# Altium PCB RasPi_Hat_Temp.PcbDoc
Units mil, origin at the board's own origin, x right, y up, seen from the top; angles counter-clockwise.
Board outline 2210 x 2560 mil, 4 copper layers (Top Layer, Internal Plane 1, Internal Plane 2, Bottom Layer), stack 25.634 mil thick; 2 components, 31 nets, 86 pads, 0 vias.
Unrouted connection lines stored in the file: 2.
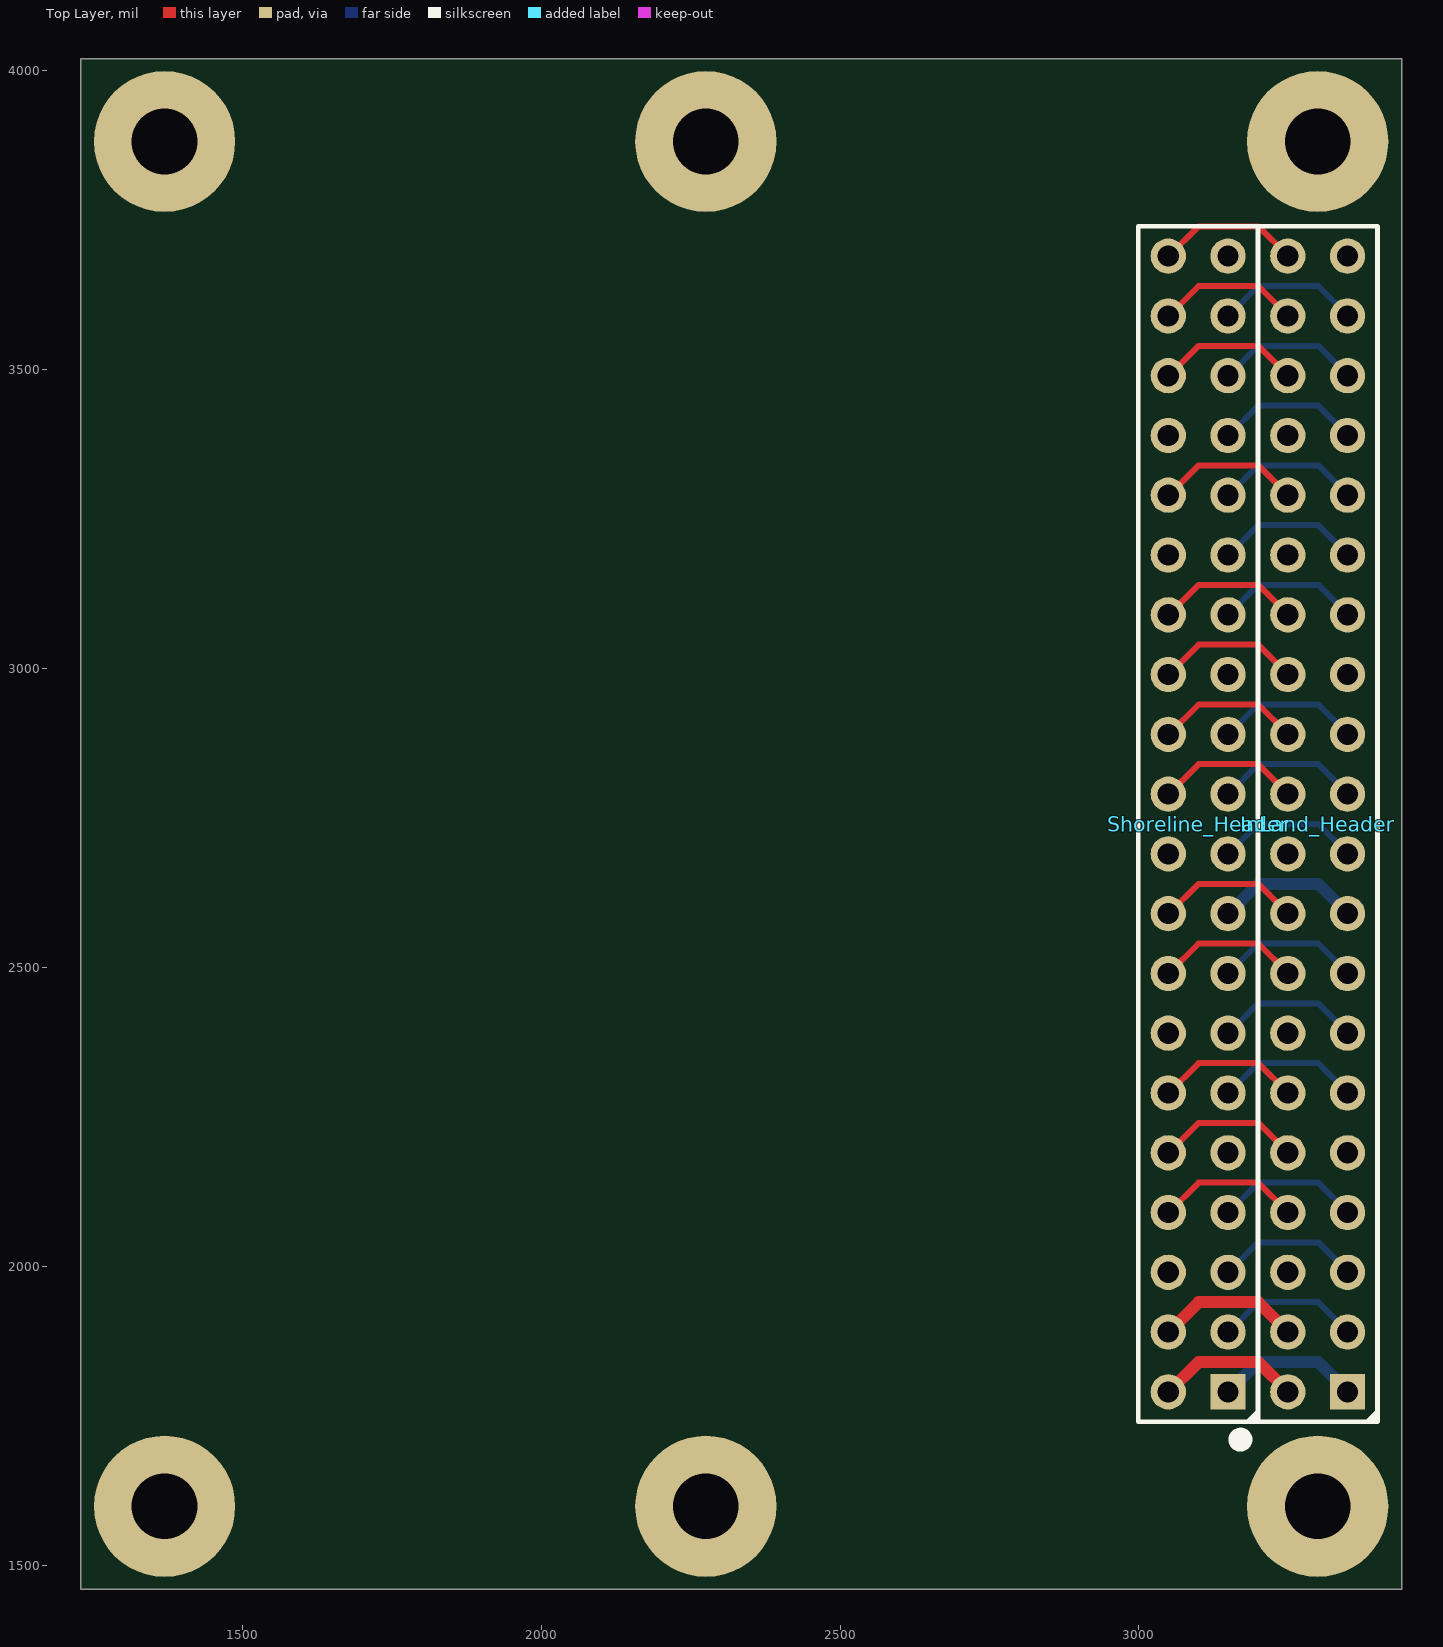
[diagram p0: Top Layer view]
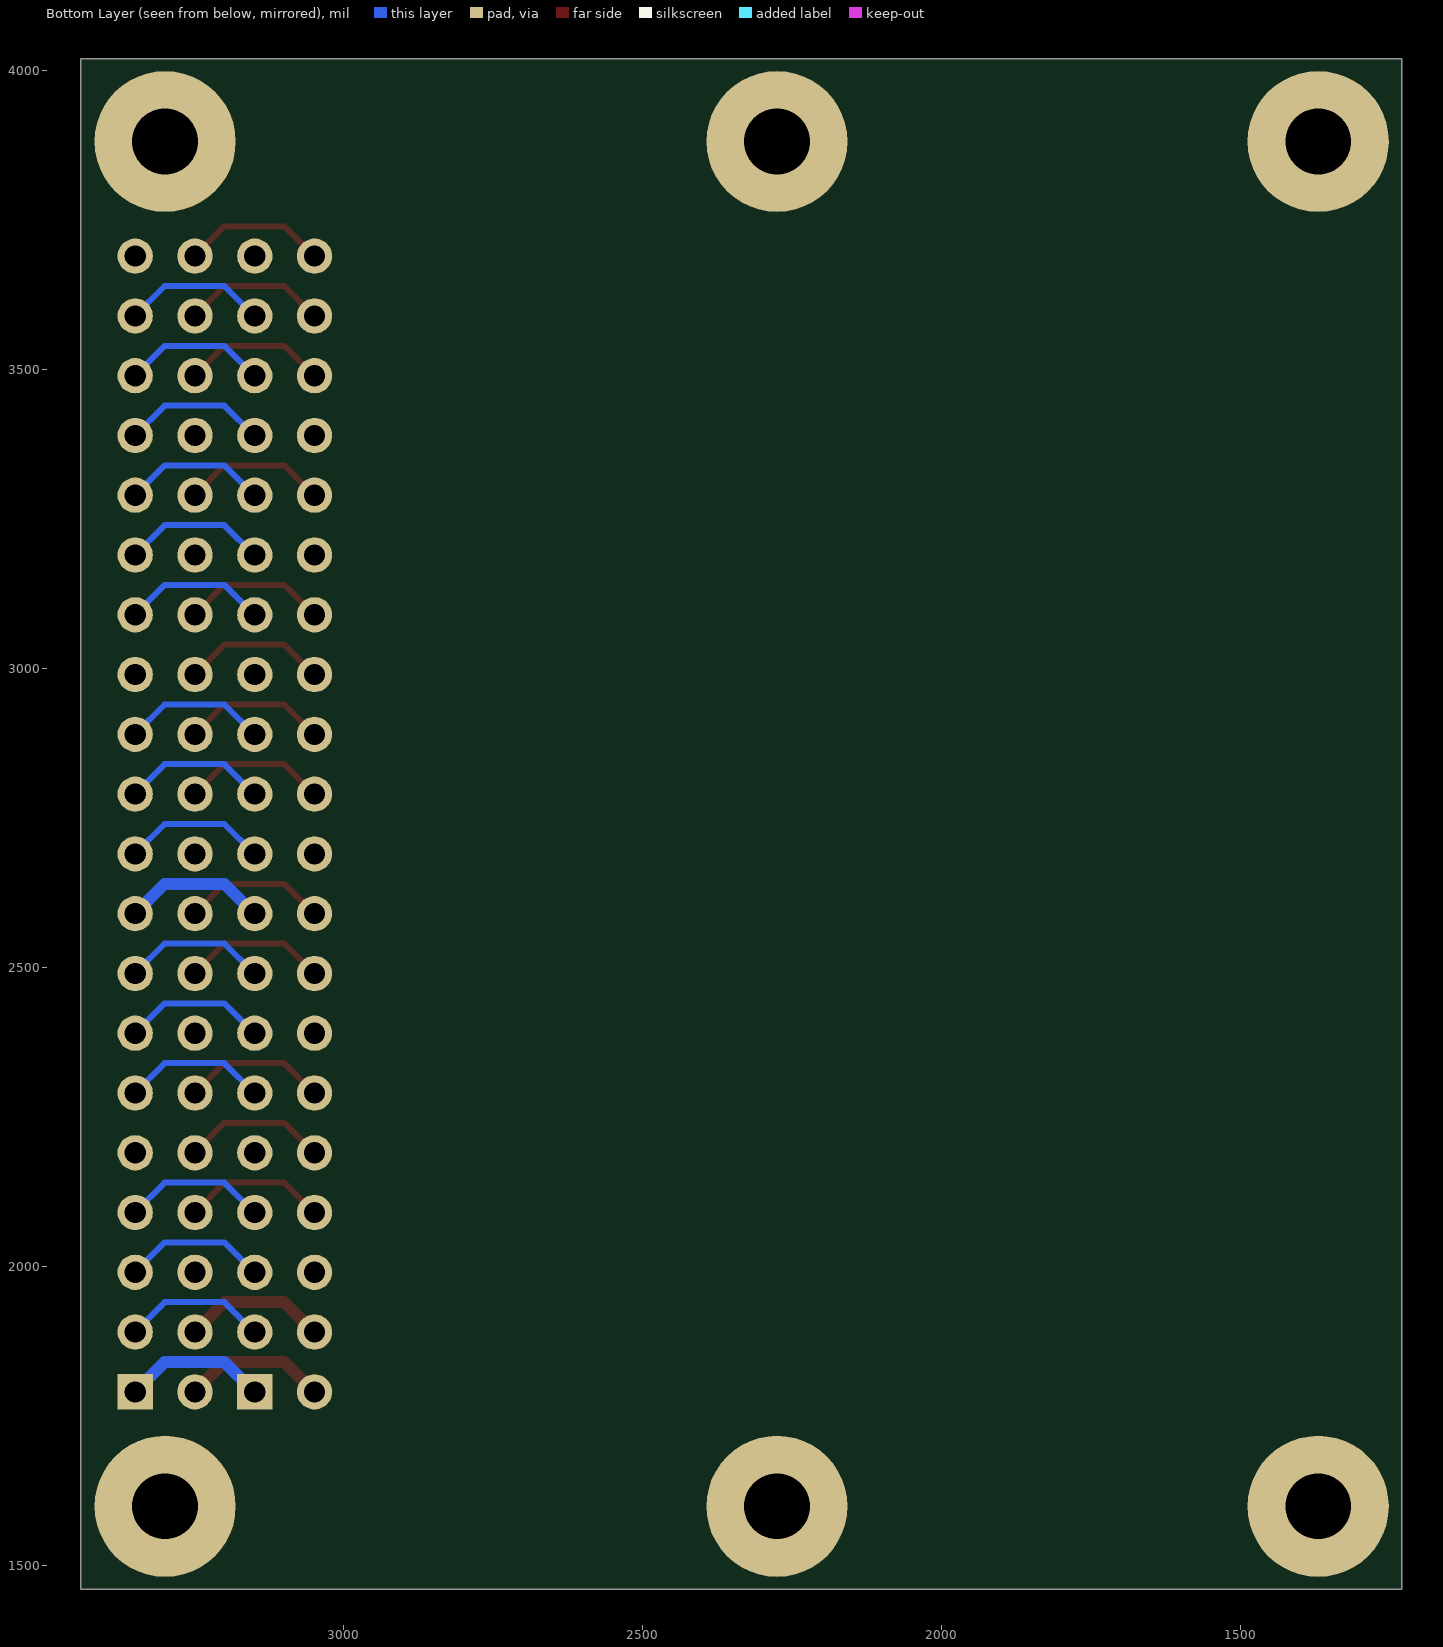
[diagram p1: Bottom Layer view, seen from below]
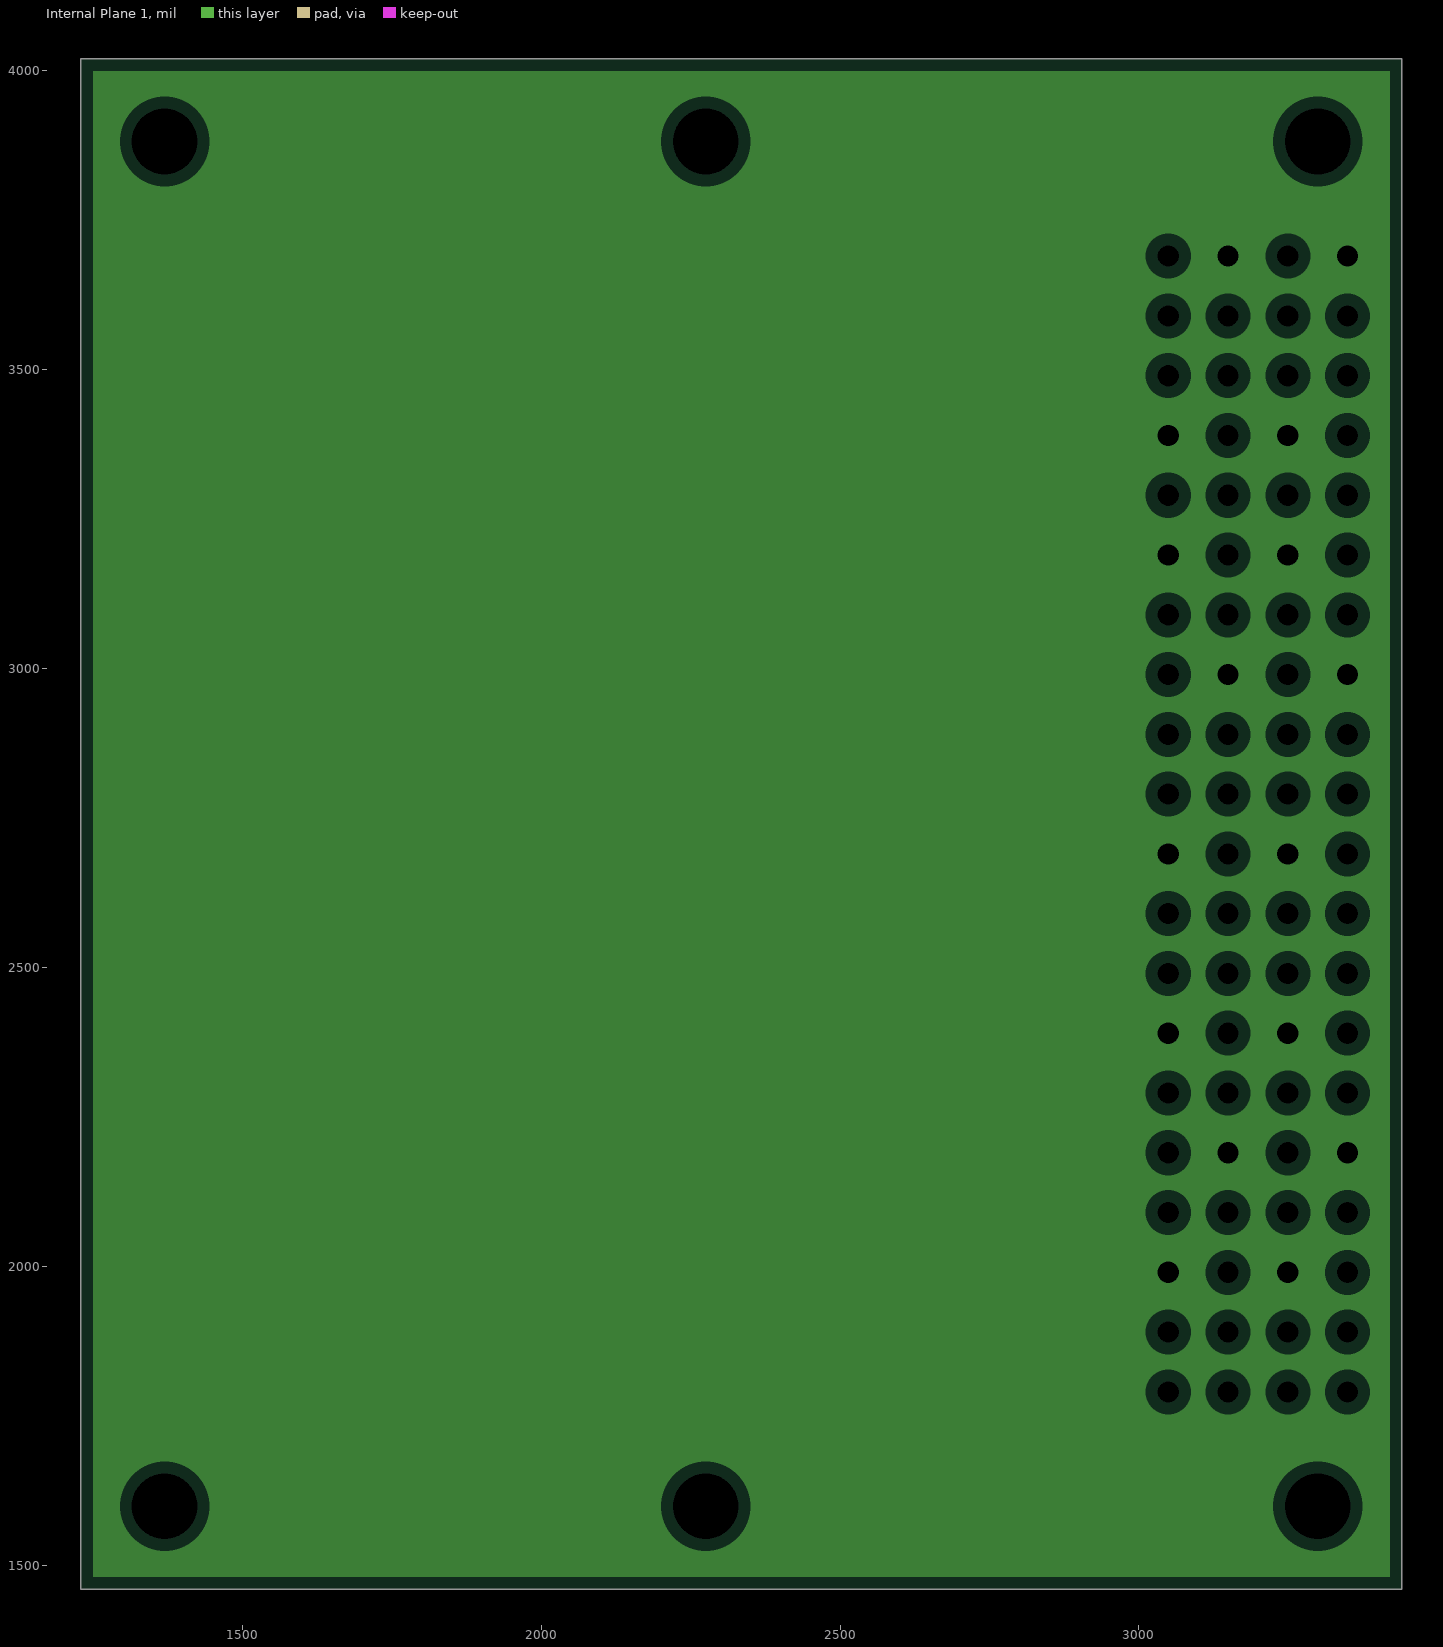
[diagram p2: Internal Plane 1, clearances drawn from the general rule]
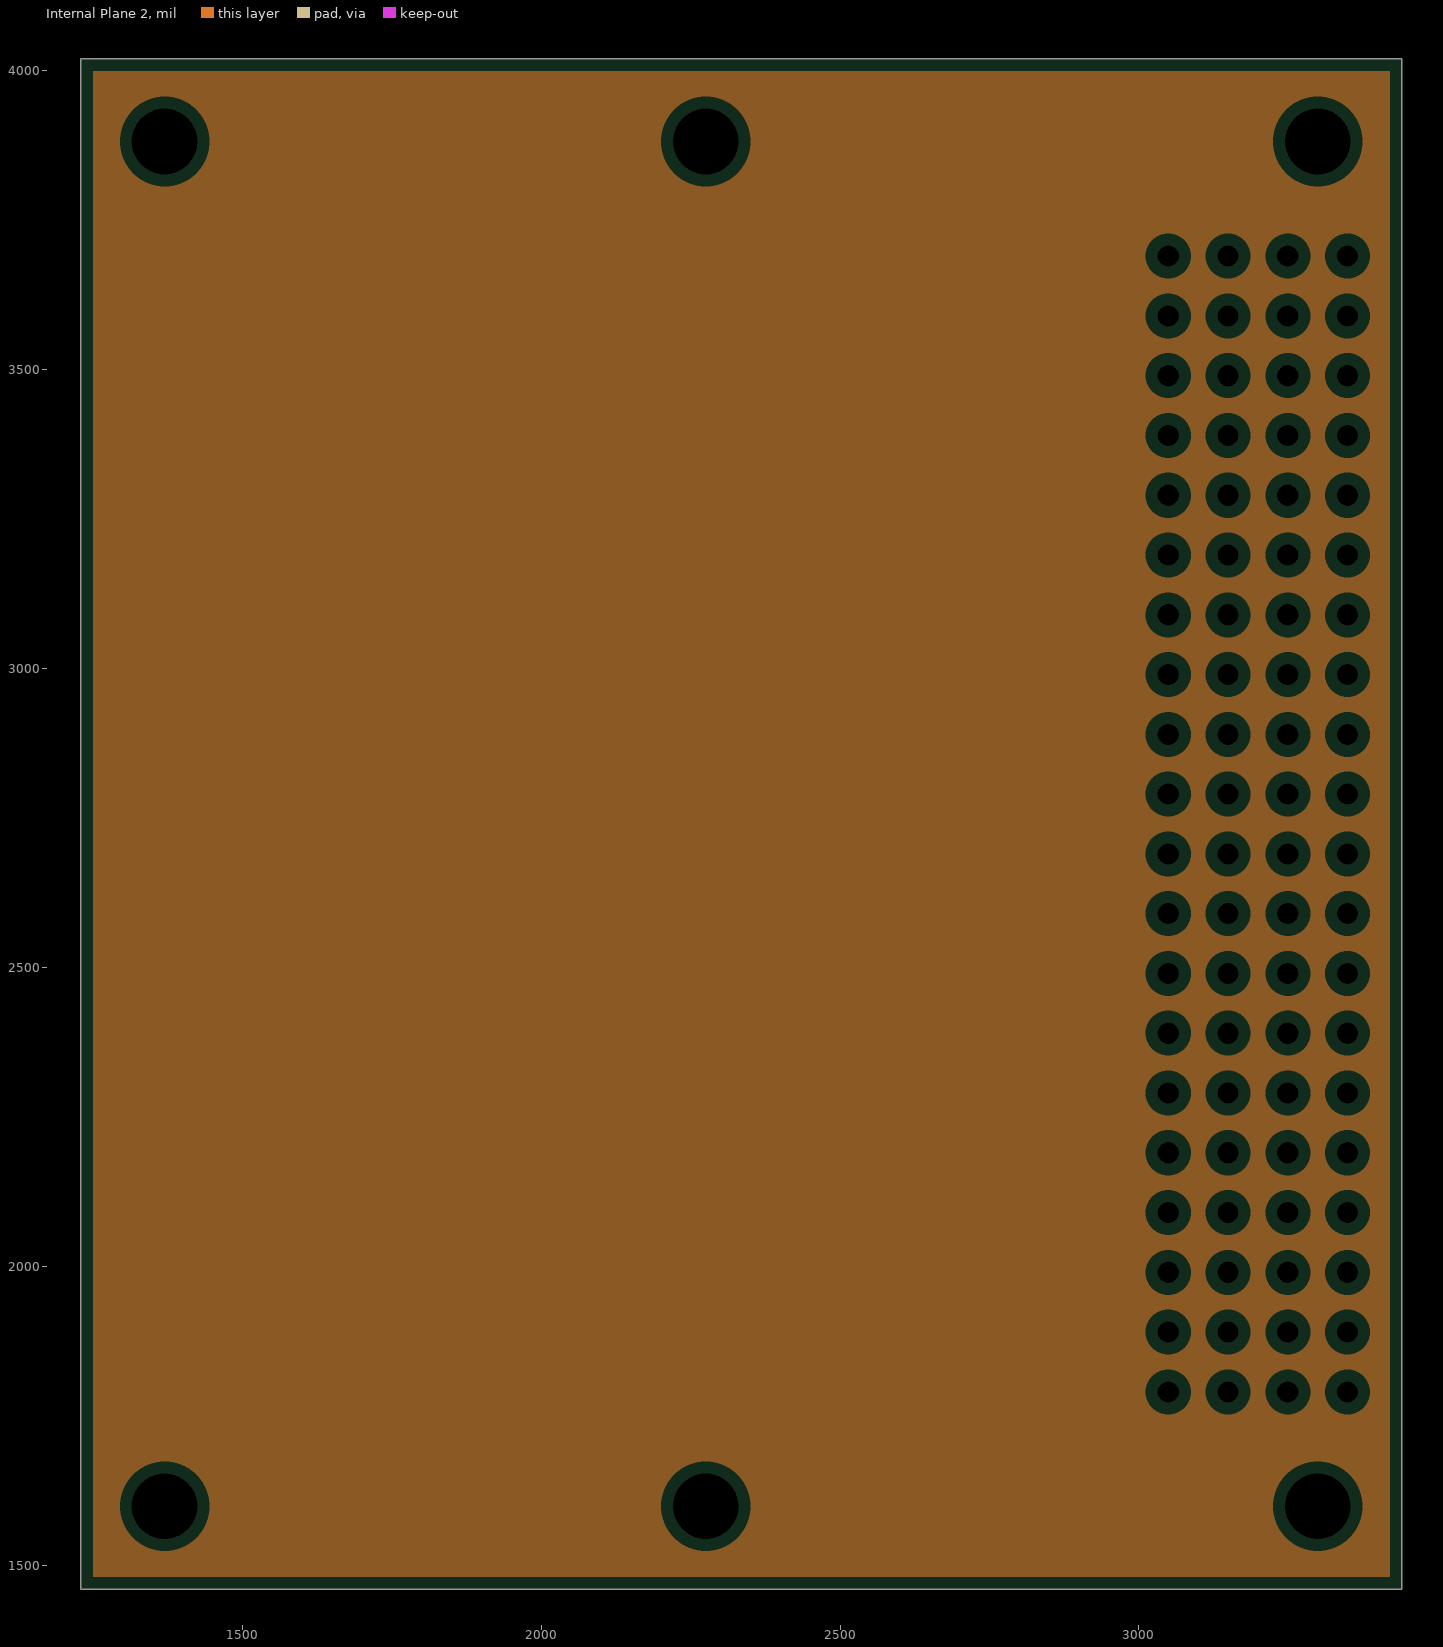
[diagram p3: Internal Plane 2, clearances drawn from the general rule]

## Layer stack, top to bottom
Top Solder: solder mask 0.4, Solder Resist, Dk 3.5
Top Layer: signal copper 1.4
Dielectric 1: prepreg 5, FR-4, Dk 4.2
Internal Plane 1: plane copper 1.417, net GND
Dielectric 3: core 10, Dk 4.2
Internal Plane 2: plane copper 1.417
Dielectric 2: prepreg 5, Dk 4.2
Bottom Layer: signal copper 1.4
Bottom Solder: solder mask 0.4, Solder Resist, Dk 3.5

## Board outline
3440,4020 3440,1460 1230,1460 1230,4020

## Design rules (kind name [scope] priority, off if disabled: settings)
Clearance [All] p1: gap=10 ignorepadtopadclearanceinfootprint=FALSE
ComponentClearance [All] p1: gap=0 collisioncheckmode=3 verticalgap=0 showdistances=FALSE
PlaneClearance [All] p1: clearance=20
PlaneConnect [All] p1: pad.planeconnectstyle=Relief pad.reliefexpansion=20 pad.reliefentries=4 pad.reliefconductorwidth=10 pad.reliefairgap=10 via.planeconnectstyle=Direct via.reliefexpansion=20 via.reliefentries=4 via.reliefconductorwidth=10 via.reliefairgap=10
PolygonConnect [All] p1: thpad.connectstyle=Relief thpad.reliefconductorwidth=10 thpad.reliefentries=4 thpad.polygonreliefangle="90 Angle" thpad.airgapwidth=10 smdpad.connectstyle=Relief smdpad.reliefconductorwidth=10 smdpad.reliefentries=4 smdpad.polygonreliefangle="90 Angle" smdpad.airgapwidth=10 via.connectstyle=Direct via.reliefconductorwidth=10 via.reliefentries=4 via.polygonreliefangle="90 Angle" via.airgapwidth=10
RoutingVias [All] p1: holewidth=28 width=50 viastyle="Through Hole" minholewidth=28 minwidth=50 maxholewidth=28 maxwidth=50
SolderMaskExpansion [All] p1: expansion=4
UnRoutedNet [All] p1: checkbadconnections=TRUE
Width [All] p1: maxlimit=50 minlimit=5 preferedwidth=12
26 further rules are at their usual default settings.

## Components (designator, comment, footprint, x,y, rotation, side; value= is the part's Value field where it differs from the comment)
InLand_Header "Header 20X2" HDR2X20 3349.13,1790 r90 top
Shoreline_Header "Header 20X2" HDR2X20 3149.13,1790 r90 top

## Footprints (in the part's own frame and the unit in brackets; to place one, negate y for a bottom-side part, rotate by r counter-clockwise, add the part's x,y. Pads: shape width x height; smd on the part's side, far side on the other; paste and mask are expansions set on the pad)
HDR2X20 [mm] "Connector; Header; 20x2 Position"
  rect 1.5x1.5 hole 0.9: 1(0,0)
  round 1.5 hole 0.9: 2(0,2.54) 3(2.54,0) 4(2.54,2.54) 5(5.08,0) 6(5.08,2.54) 7(7.62,0) 8(7.62,2.54) 9(10.16,0) 10(10.16,2.54) 11(12.7,0) 12(12.7,2.54) 13(15.24,0) 14(15.24,2.54) 15(17.78,0) 16(17.78,2.54) 17(20.32,0) 18(20.32,2.54) 19(22.86,0) 20(22.86,2.54) 21(25.4,0) 22(25.4,2.54) 23(27.94,0) 24(27.94,2.54) 25(30.48,0) 26(30.48,2.54) 27(33.02,0) 28(33.02,2.54) 29(35.56,0) 30(35.56,2.54) 31(38.1,0) 32(38.1,2.54) 33(40.64,0) 34(40.64,2.54) 35(43.18,0) 36(43.18,2.54) 37(45.72,0) 38(45.72,2.54) 39(48.26,0) 40(48.26,2.54)
  silkscreen extent -1.27,-1.27 49.53,3.81

## Part data
InLand_Header Shoreline_Header: "Header, 20-Pin, Dual row", LatestRevisionDate=17-Jul-2002, LatestRevisionNote="Re-released for DXP Platform.", Publisher="Altium Limited"

## Free pads (board coordinates)
  round 236.22 hole 110 unplated: 77(1370,1598.5) 78(1370,3881.81) 79(2275.51,3881.81) 80(2275.51,1598.5) 81(3299.13,3881.81) 82(3299.13,1598.5)

## Nets (pads, with @x,y where several pads share a name; then routed paths per layer and width w, separated by ;. In a path a pad name is that pad's centre, name@x,y a point inside that pad or via, vN(x,y) a via of type N, cw(c..) or ccw(c..) an arc to the next point about the centre after c; other vN are vias at no path point)
3: InLand_Header.3 Shoreline_Header.3 | length 241.4
  Bottom Layer w10: Shoreline_Header.3@3150,1890 3200,1940 3300,1940 InLand_Header.3@3350,1890
3V3: InLand_Header.1 InLand_Header.17 Shoreline_Header.1 Shoreline_Header.17 | length 482.8
  Bottom Layer w20: Shoreline_Header.1@3150,1790 3200,1840 3300,1840 InLand_Header.1@3350,1790 ; Shoreline_Header.17@3150,2590 3200,2640 3300,2640 InLand_Header.17@3350,2590
5: InLand_Header.5 Shoreline_Header.5 | length 241.4
  Bottom Layer w10: Shoreline_Header.5@3150,1990 3200,2040 3300,2040 InLand_Header.5@3350,1990
5V: InLand_Header.2 InLand_Header.4 Shoreline_Header.2 Shoreline_Header.4 | length 482.8
  Top Layer w20: Shoreline_Header.2@3050,1790 3100,1840 3200,1840 InLand_Header.2@3250,1790 ; Shoreline_Header.4@3050,1890 3100,1940 3200,1940 InLand_Header.4@3250,1890
7: InLand_Header.7 Shoreline_Header.7 | length 241.4
  Bottom Layer w10: Shoreline_Header.7@3150,2090 3200,2140 3300,2140 InLand_Header.7@3350,2090
8: InLand_Header.8 Shoreline_Header.8 | length 241.4
  Top Layer w10: Shoreline_Header.8@3050,2090 3100,2140 3200,2140 InLand_Header.8@3250,2090
10: InLand_Header.10 Shoreline_Header.10 | length 241.4
  Top Layer w10: Shoreline_Header.10@3050,2190 3100,2240 3200,2240 InLand_Header.10@3250,2190
11: InLand_Header.11 Shoreline_Header.11 | length 241.4
  Bottom Layer w10: Shoreline_Header.11@3150,2290 3200,2340 3300,2340 InLand_Header.11@3350,2290
12: InLand_Header.12 Shoreline_Header.12 | length 241.4
  Top Layer w10: Shoreline_Header.12@3050,2290 3100,2340 3200,2340 InLand_Header.12@3250,2290
13: InLand_Header.13 Shoreline_Header.13 | length 241.4
  Bottom Layer w10: Shoreline_Header.13@3150,2390 3200,2440 3300,2440 InLand_Header.13@3350,2390
15: InLand_Header.15 Shoreline_Header.15 | length 241.4
  Bottom Layer w10: Shoreline_Header.15@3150,2490 3200,2540 3300,2540 InLand_Header.15@3350,2490
16: InLand_Header.16 Shoreline_Header.16 | length 241.4
  Top Layer w10: Shoreline_Header.16@3050,2490 3100,2540 3200,2540 InLand_Header.16@3250,2490
18: InLand_Header.18 Shoreline_Header.18 | length 242
  Top Layer w10: Shoreline_Header.18@3049.57,2589.57 3100,2640 3200,2640 InLand_Header.18@3250,2590
19: InLand_Header.19 Shoreline_Header.19 | length 241.4
  Bottom Layer w10: Shoreline_Header.19@3150,2690 3200,2740 3300,2740 InLand_Header.19@3350,2690
21: InLand_Header.21 Shoreline_Header.21 | length 241.4
  Bottom Layer w10: Shoreline_Header.21@3150,2790 3200,2840 3300,2840 InLand_Header.21@3350,2790
22: InLand_Header.22 Shoreline_Header.22 | length 241.4
  Top Layer w10: Shoreline_Header.22@3050,2790 3100,2840 3200,2840 InLand_Header.22@3250,2790
23: InLand_Header.23 Shoreline_Header.23 | length 241.4
  Bottom Layer w10: Shoreline_Header.23@3150,2890 3200,2940 3300,2940 InLand_Header.23@3350,2890
24: InLand_Header.24 Shoreline_Header.24 | length 241.4
  Top Layer w10: Shoreline_Header.24@3050,2890 3100,2940 3200,2940 InLand_Header.24@3250,2890
26: InLand_Header.26 Shoreline_Header.26 | length 241.4
  Top Layer w10: Shoreline_Header.26@3050,2990 3100,3040 3200,3040 InLand_Header.26@3250,2990
27: InLand_Header.27 Shoreline_Header.27 | length 241.4
  Bottom Layer w10: Shoreline_Header.27@3150,3090 3200,3140 3300,3140 InLand_Header.27@3350,3090
28: InLand_Header.28 Shoreline_Header.28 | length 241.4
  Top Layer w10: Shoreline_Header.28@3050,3090 3100,3140 3200,3140 InLand_Header.28@3250,3090
29: InLand_Header.29 Shoreline_Header.29 | length 241.4
  Bottom Layer w10: Shoreline_Header.29@3150,3190 3200,3240 3300,3240 InLand_Header.29@3350,3190
31: InLand_Header.31 Shoreline_Header.31 | length 241.4
  Bottom Layer w10: Shoreline_Header.31@3150,3290 3200,3340 3300,3340 InLand_Header.31@3350,3290
32: InLand_Header.32 Shoreline_Header.32 | length 241.4
  Top Layer w10: Shoreline_Header.32@3050,3290 3100,3340 3200,3340 InLand_Header.32@3250,3290
33: InLand_Header.33 Shoreline_Header.33 | length 241.4
  Bottom Layer w10: Shoreline_Header.33@3150,3390 3200,3440 3300,3440 InLand_Header.33@3350,3390
35: InLand_Header.35 Shoreline_Header.35 | length 241.4
  Bottom Layer w10: Shoreline_Header.35@3150,3490 3200,3540 3300,3540 InLand_Header.35@3350,3490
36: InLand_Header.36 Shoreline_Header.36 | length 241.4
  Top Layer w10: Shoreline_Header.36@3050,3490 3100,3540 3200,3540 InLand_Header.36@3250,3490
37: InLand_Header.37 Shoreline_Header.37 | length 242
  Bottom Layer w10: Shoreline_Header.37@3149.57,3589.57 3200,3640 3300,3640 InLand_Header.37@3350,3590
38: InLand_Header.38 Shoreline_Header.38 | length 241.4
  Top Layer w10: Shoreline_Header.38@3049.57,3589.57 3100,3640 3200,3640 InLand_Header.38@3249.57,3590.43
40: InLand_Header.40 Shoreline_Header.40 | length 241.4
  Top Layer w10: Shoreline_Header.40@3049.57,3689.57 3100,3740 3200,3740 InLand_Header.40@3249.57,3690.43
GND: InLand_Header.6 InLand_Header.9 InLand_Header.14 InLand_Header.20 InLand_Header.25 InLand_Header.30 InLand_Header.34 InLand_Header.39 Shoreline_Header.6 Shoreline_Header.9 Shoreline_Header.14 Shoreline_Header.20 Shoreline_Header.25 Shoreline_Header.30 Shoreline_Header.34 Shoreline_Header.39

## Polygon pours and split planes (outlines as drawn)
GND on Internal Plane 1 (split plane): 3419.9,1480.1 1250.1,1480.1 1250.1,3999.9 3419.9,3999.9
no net on Internal Plane 2 (split plane): 3419.9,1480.1 1250.1,1480.1 1250.1,3999.9 3419.9,3999.9

## Silkscreen, mask and mechanical layers (free items; w line width, h text height)
Top Overlay:
  circle w20: c3170,1710 r10
  lines w5: 3180,1740 3200,1760 ; 3190,1740 3190,1750 ; 3380,1740 3400,1760 ; 3400,1740 3390,1750 ; 3190,1750 3200,1750 3200,1740 3190,1750 ; 3390,1750 3400,1750 3390,1740 3390,1750